# EAGLE board Parity odd (EAGLE 9.7.0)

Size 75.59 x 76.64 mm. Coordinates in mm from the lower left corner, seen from the top.
Outline: 0,0 75.59,0 75.59,76.64 0,76.64 0,0
Copper layers (1*16): Top 0.035mm / dielectric 1.5mm / Bottom 0.035mm
Design rules "default": minimum track width 6mil, minimum drill 0.35mm, track to track 6mil, track to pad 6mil, pad to pad 6mil, via to via 6mil, smd to smd 6mil, copper to edge 40mil, drill to drill 6mil, minimum pad ring 10mil, minimum via ring 8mil, stop-mask expansion 4mil, vias tented up to drill 0mil, thermal gap 10mil

## Footprints (pad centres in the part's own frame; a part is rotated, then mirrored left to right if it is on the bottom)
LEDRD254W60D565H860B = drill 0.981 pad 1.581: 1 -1.27,0; 2 1.27,0
BATTERY-GENERIC = drill 1.118 pad 3.15 octagon: + 2.54,0; - -2.54,0
RESAD1016W63L850D250B = drill 0.83 pad 1.43: 1 -5.08,0; 2 5.08,0
78B04ST = drill 0.8: 1 -3.81,-3.81; 2 -1.27,-3.81; 3 1.27,-3.81; 4 3.81,-3.81; 5 3.81,3.81; 6 1.27,3.81; 7 -1.27,3.81; 8 -3.81,3.81
DIP762W53P254L1969H508Q14B = drill 0.743 pad 1.343: 1 -3.81,7.62; 2 -3.81,5.08; 3 -3.81,2.54; 4 -3.81,0; 5 -3.81,-2.54; 6 -3.81,-5.08; 7 -3.81,-7.62; 8 3.81,-7.62; 9 3.81,-5.08; 10 3.81,-2.54; 11 3.81,0; 12 3.81,2.54; 13 3.81,5.08; 14 3.81,7.62

## Placement (x,y rotation side)
D1  RED  [LEDRD254W60D565H860B]  69.53,13.95 180 top
P1  BATTERYGENERIC  [BATTERY-GENERIC]  15.12,53.99 180 top
R1  1k  [RESAD1016W63L850D250B]  53.02,6.33 0 top
SW1  SPST-478B04ST  [78B04ST]  42.96,67.11 0 top
U1  74HC86_PDIP  [DIP762W53P254L1969H508Q14B]  14.93,17.76 90 top
U3  74HC04_PDIP  [DIP762W53P254L1969H508Q14B]  37.78,17.76 90 top

## Library data of the parts
D1 = Tinkercad; CATEGORY: Opto-Electronic; SUB-CATEGORY: LED; VALUE: LED_RED
P1 R1 SW1 U1 U3 = Tinkercad

## Nets
D1_A: D1.1 R1.2
P1+: P1.+ SW1.1 SW1.2 U1.14 U3.14
P1-: D1.2 P1.- U1.7 U3.7
U1_1A: SW1.8 U1.1
U1_1B: SW1.7 U1.2
U1_1Y: U1.3 U3.1
U3_1Y: R1.1 U3.2

## Tracks (layer width: path | path; a pad name or v marks a point on that pad's centre or on a via)
D1_A  (1 unrouted)
P1+  (4 unrouted)
P1-  (3 unrouted)
U1_1A  (1 unrouted)
U1_1B  (1 unrouted)
U1_1Y  (1 unrouted)
U3_1Y  (1 unrouted)